# Altium PCB FT4232H-USB to UART.PcbDoc
Units mm, origin at the board's own origin, x right, y up, seen from the top; angles counter-clockwise.
Board outline 35.58 x 29.15 mm, 2 copper layers (Top Layer, Bottom Layer), stack 1.571 mm thick; 41 components, 61 nets, 210 pads, 46 vias.
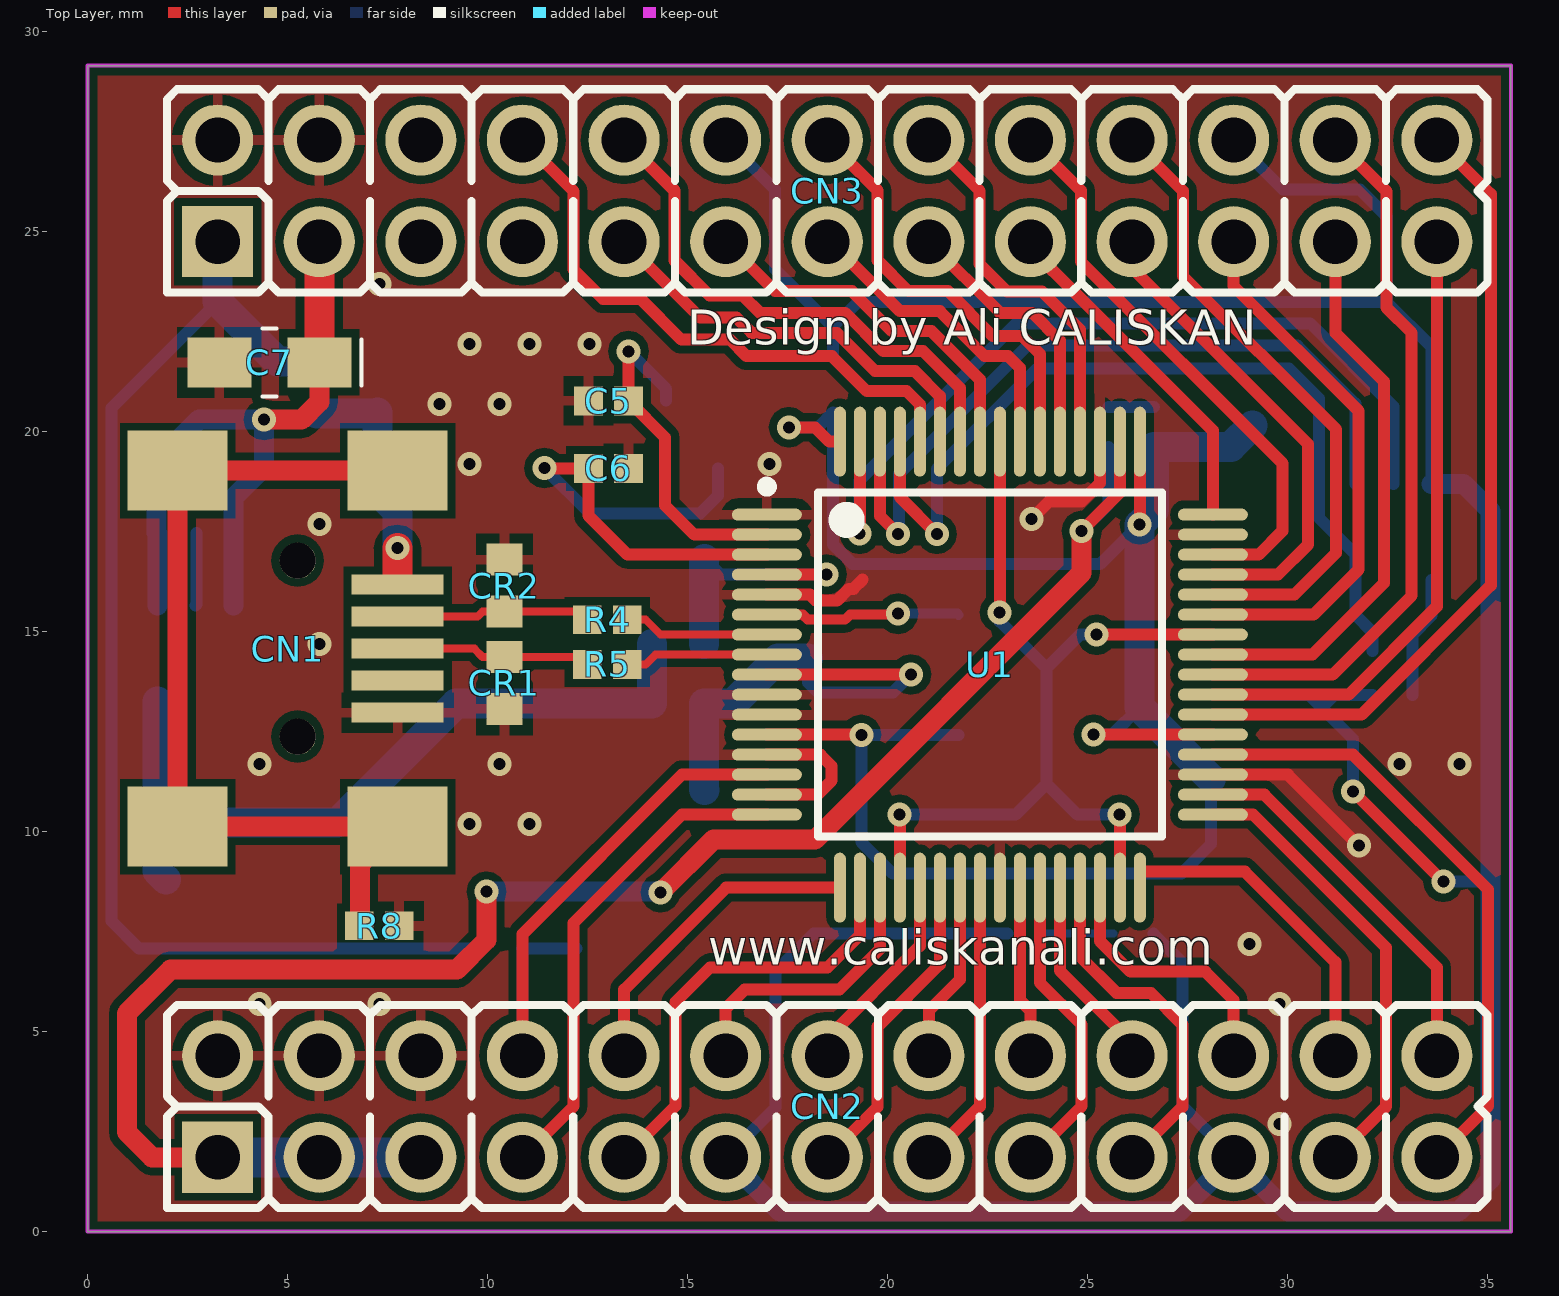
[diagram p0: Top Layer view]
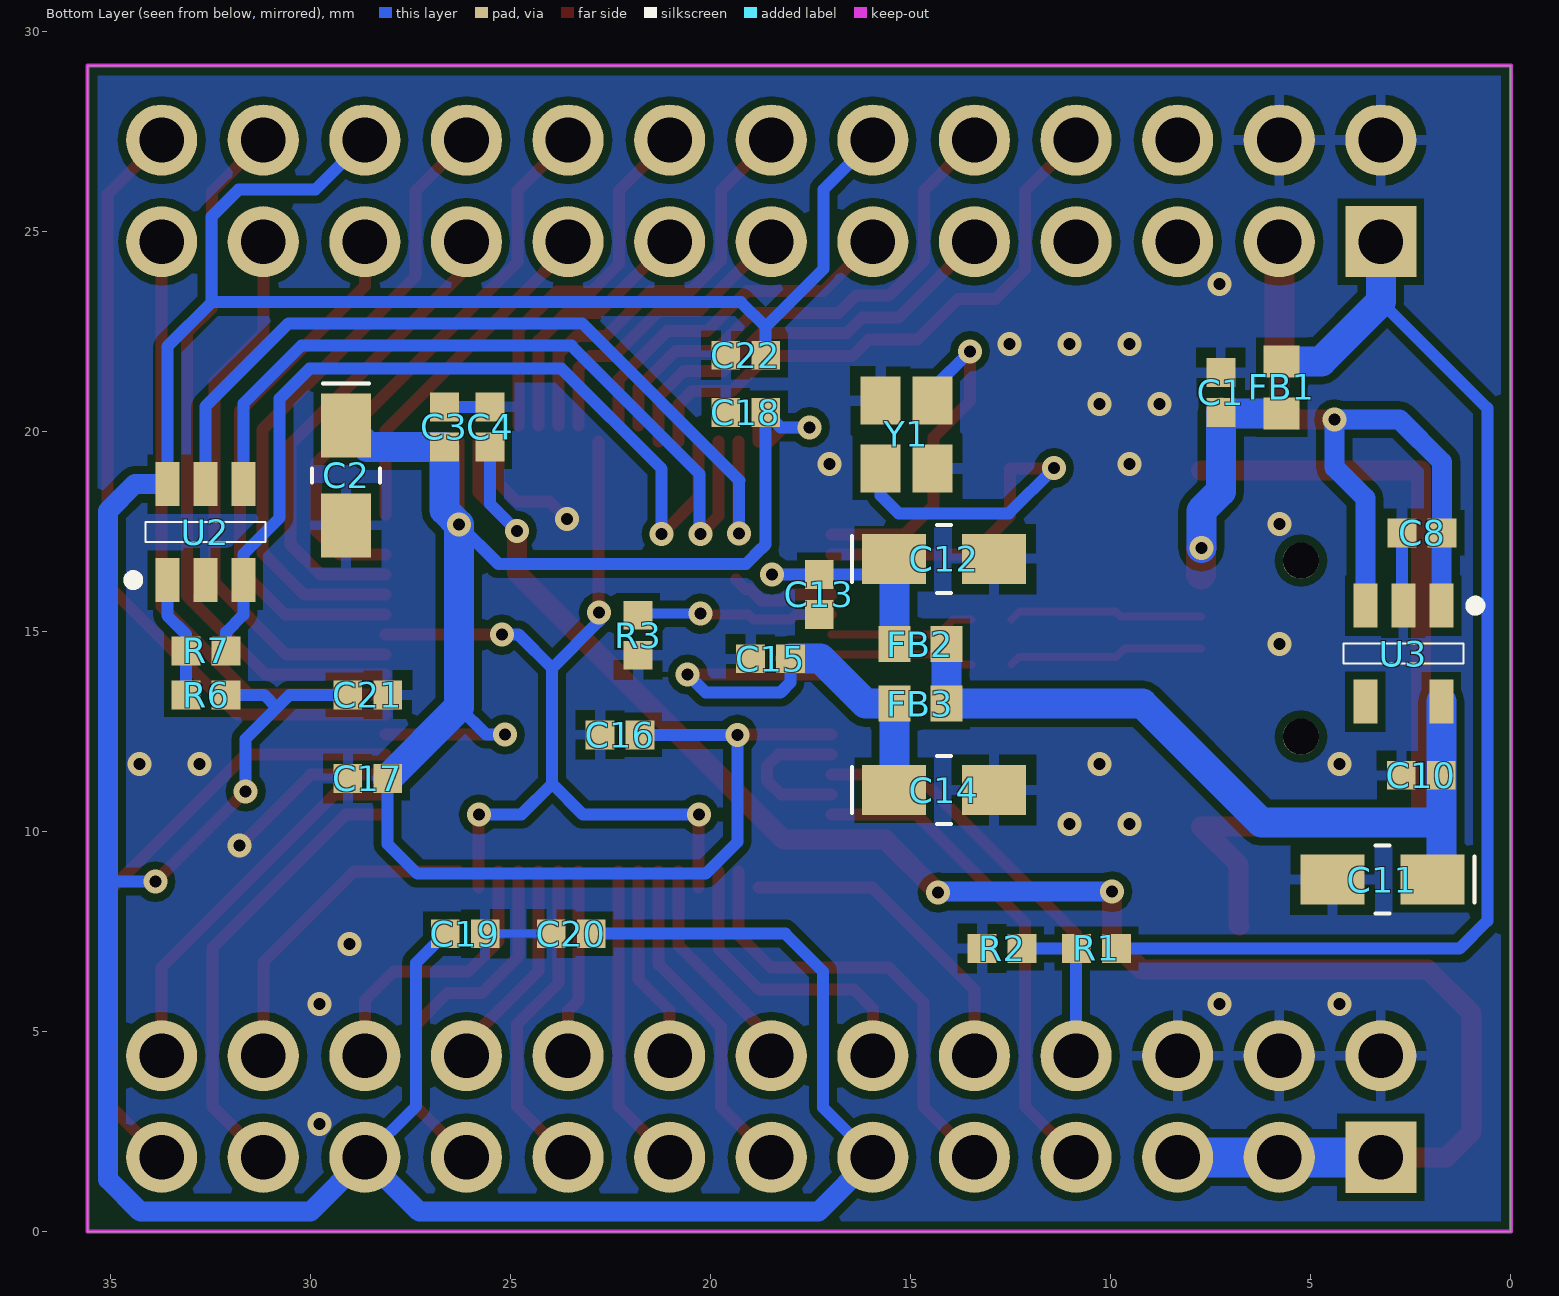
[diagram p1: Bottom Layer view, seen from below]
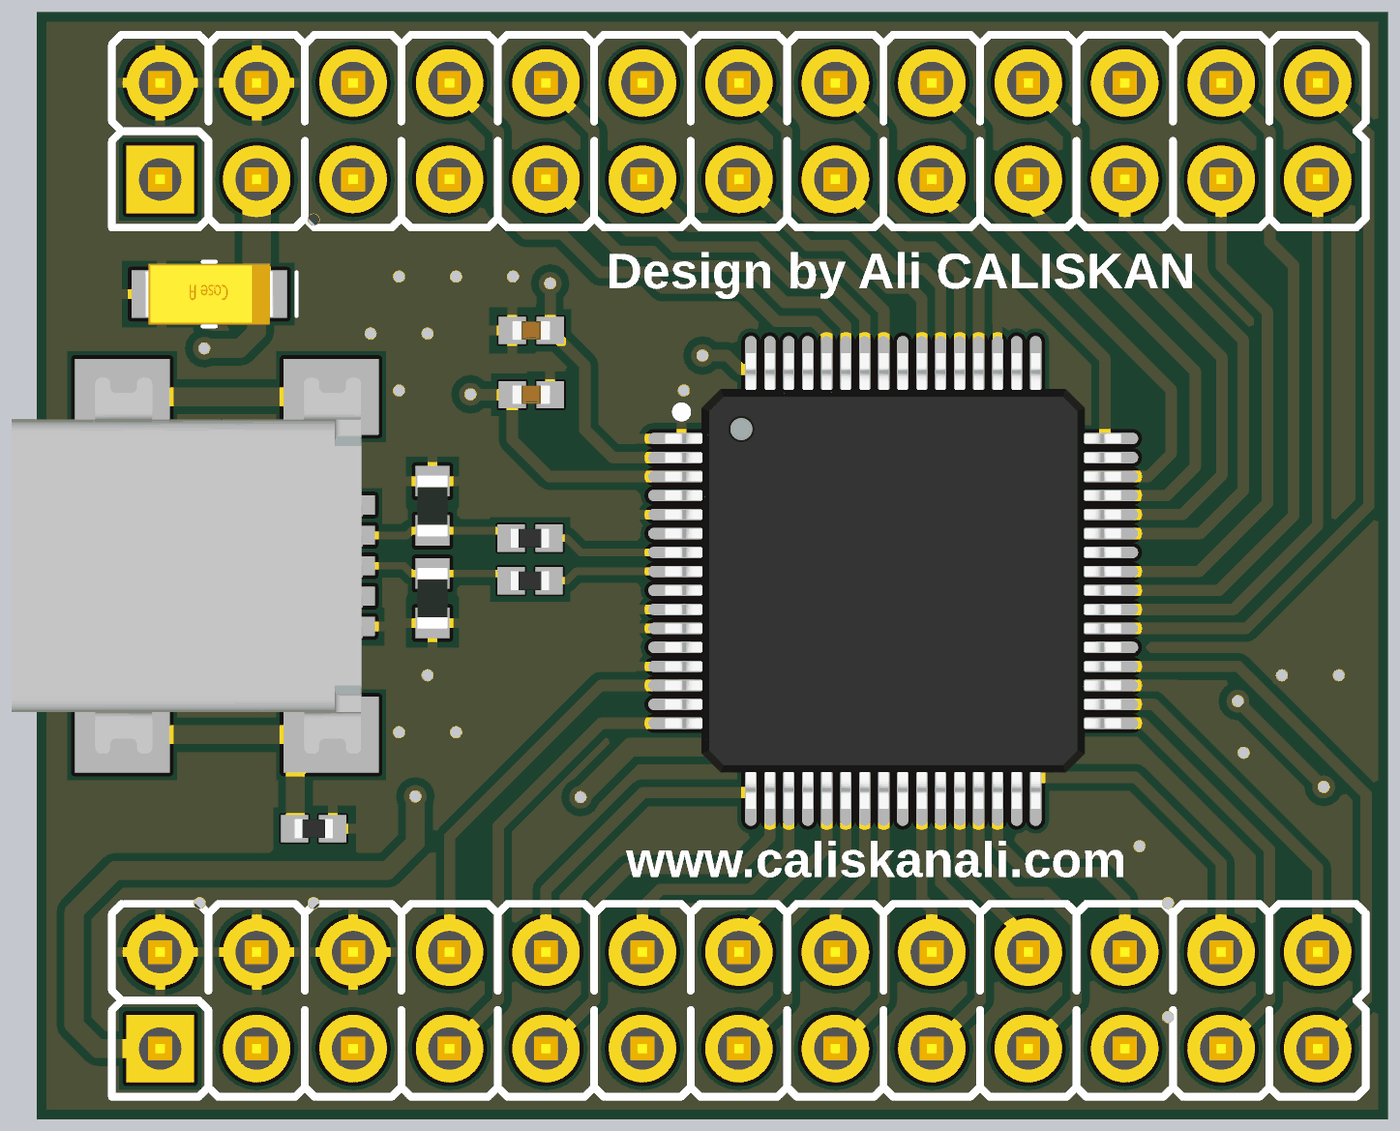
[diagram p2: 3D render of the assembled board from above, using the file's embedded part models]
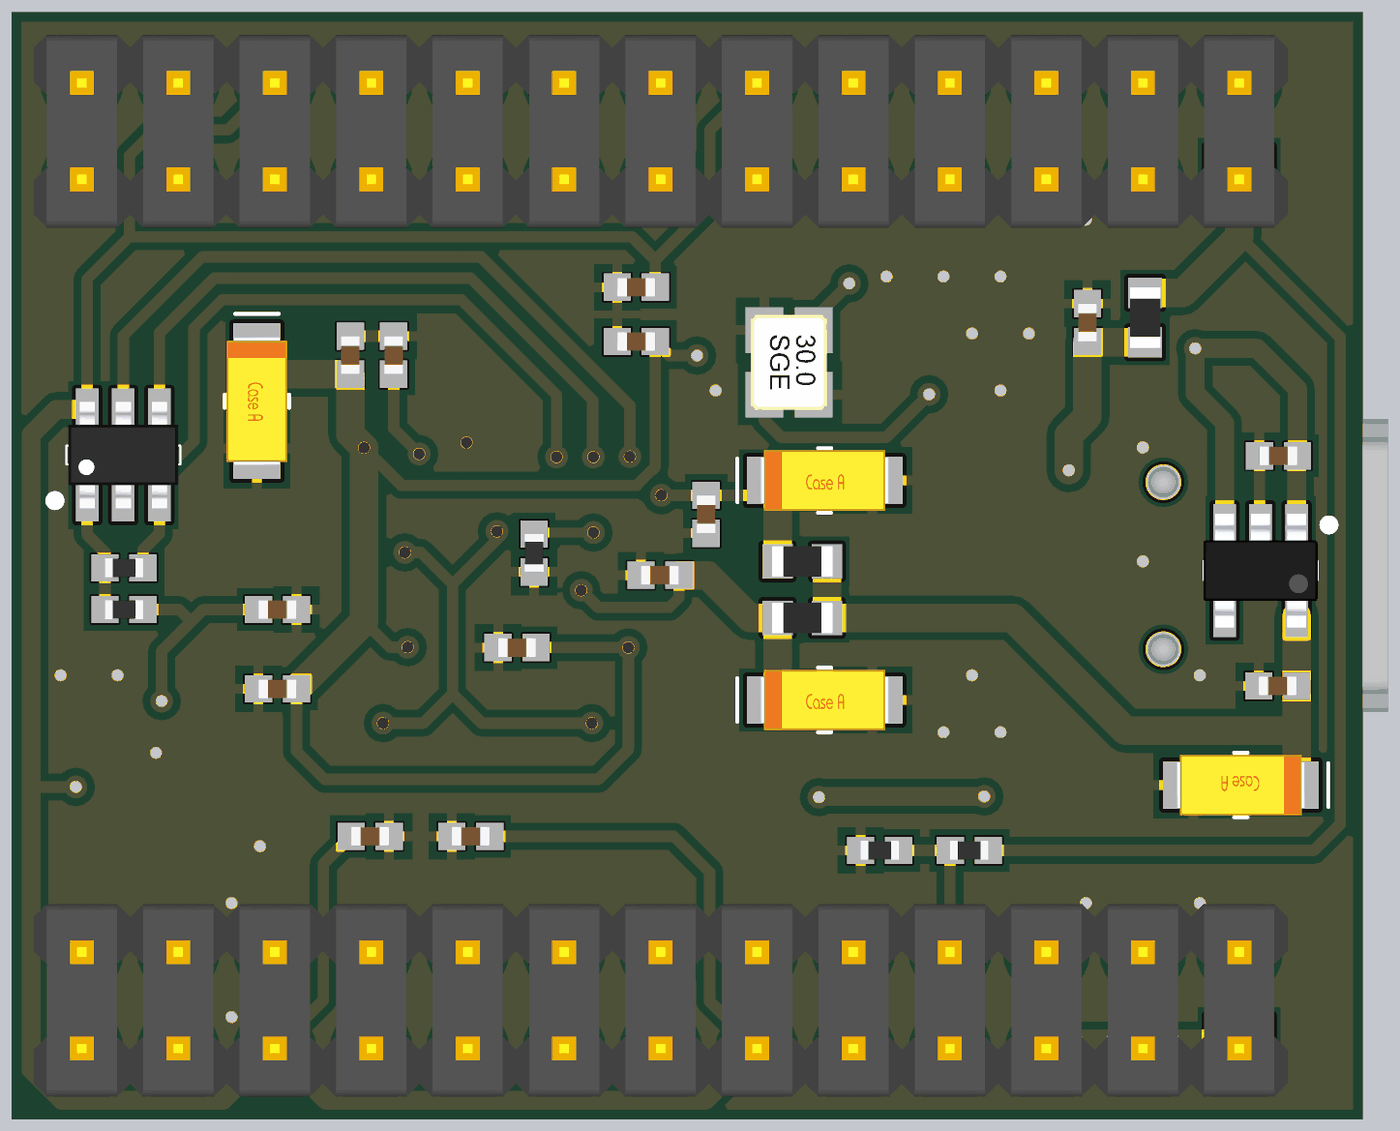
[diagram p3: 3D render of the assembled board from below, using the file's embedded part models]

## Layer stack, top to bottom
Top Solder: solder mask 0.0102, Solder Resist, Dk 3.5
Top Layer: signal copper 0.0356
Dielectric 1: dielectric 1.5, FR-4, Dk 4.8
Bottom Layer: signal copper 0.0356
Bottom Solder: solder mask 0.0102, Solder Resist, Dk 3.5

## Board outline
0,0 35.58,0 35.58,29.15 0,29.15

## Design rules (kind name [scope] priority, off if disabled: settings)
Clearance [All] p1: gap=0.2 ignorepadtopadclearanceinfootprint=FALSE except(0: Arc-Hole Track-Hole SMDPad-Hole THPad-Hole Via-Hole Fill-Hole Poly-Hole Region-Hole Text-Hole)
DiffPairsRouting "Schematic Differential Pairs Routing_3" [InNet('USB-B_P')] p1: maxlimit=0.2 minlimit=0.2 mostfreqgap=0.2 toplayer_minwidth=0.2 toplayer_maxwidth=0.2 toplayer_prefwidth=0.2 bottomlayer_minwidth=0.2 bottomlayer_maxwidth=0.2 bottomlayer_prefwidth=0.2 maxuncoupledlength=12.7
DiffPairsRouting "Schematic Differential Pairs Routing_1" [InNet('USB-B_N')] p2: maxlimit=0.2 minlimit=0.2 mostfreqgap=0.2 toplayer_minwidth=0.2 toplayer_maxwidth=0.2 toplayer_prefwidth=0.2 bottomlayer_minwidth=0.2 bottomlayer_maxwidth=0.2 bottomlayer_prefwidth=0.2 maxuncoupledlength=12.7
DiffPairsRouting "Schematic Differential Pairs Routing" [InNet('USB-A_P')] p3: maxlimit=0.2 minlimit=0.2 mostfreqgap=0.2 toplayer_minwidth=0.2 toplayer_maxwidth=0.2 toplayer_prefwidth=0.2 bottomlayer_minwidth=0.2 bottomlayer_maxwidth=0.2 bottomlayer_prefwidth=0.2 maxuncoupledlength=12.7
DiffPairsRouting "Schematic Differential Pairs Routing_2" [InNet('USB-A_N')] p4: maxlimit=0.2 minlimit=0.2 mostfreqgap=0.2 toplayer_minwidth=0.2 toplayer_maxwidth=0.2 toplayer_prefwidth=0.2 bottomlayer_minwidth=0.2 bottomlayer_maxwidth=0.2 bottomlayer_prefwidth=0.2 maxuncoupledlength=12.7
DiffPairsRouting [All] p5: maxlimit=0.254 minlimit=0.254 mostfreqgap=0.254 toplayer_minwidth=0.381 toplayer_maxwidth=0.381 toplayer_prefwidth=0.381 bottomlayer_minwidth=0.381 bottomlayer_maxwidth=0.381 bottomlayer_prefwidth=0.381 maxuncoupledlength=12.7
PolygonConnect isvia [IsVia] p1: connectstyle=Direct reliefconductorwidth=0.254 reliefentries=4 polygonreliefangle="90 Angle" airgapwidth=0.254
PolygonConnect [All] p2: connectstyle=Relief reliefconductorwidth=0.254 reliefentries=4 polygonreliefangle="90 Angle" airgapwidth=0.254
RoutingVias [All] p1: holewidth=0.3 width=0.6 viastyle="Through Hole" minholewidth=0.3 minwidth=0.6 maxholewidth=0.3 maxwidth=0.6
SolderMaskExpansion [All] p1: expansion=0.102
Width [All] p1 off: maxlimit=0.254 minlimit=0.254 preferedwidth=0.254
29 further rules are at their usual default settings.

## Classes and differential pairs
differential pair USB-B: +USB-B_P -USB-B_N
differential pair USB-A: +USB-A_P -USB-A_N

## Components (designator, comment, footprint, x,y, rotation, side; value= is the part's Value field where it differs from the comment)
C1 "10nF" C0402(1005) 7.25,20.98 r90 bottom
C2 "4.7uF" TANT_C1206(3216) 29.12,18.91 r270 bottom
C3 "100nF" C0402(1005) 26.66,20.12 r90 bottom
C4 "100nF" C0402(1005) 25.52,20.12 r90 bottom
C5 "30pF" C0402(1005) 13.02,20.77 r180 top
C6 "30pF" C0402(1005) 13.02,19.08 r0 top
C7 "4.7uF" TANT_C1206(3216) 4.54,21.73 r180 top
C8 "100nF" C0402(1005) 2.22,17.47 r0 bottom
C10 "100nF" C0402(1005) 2.24,11.41 r0 bottom
C11 "4.7uF" TANT_C1206(3216) 3.21,8.8 r0 bottom
C12 "4.7uF" TANT_C1206(3216) 14.17,16.82 r180 bottom
C13 "100nF" C0402(1005) 17.29,15.93 r270 bottom
C14 "4.7uF" TANT_C1206(3216) 14.17,11.04 r180 bottom
C15 "100nF" C0402(1005) 18.509,14.325 r0 bottom
C16 "100nF" C0402(1005) 22.27,12.42 r0 bottom
C17 "100nF" C0402(1005) 28.58,11.33 r0 bottom
C18 "100nF" C0402(1005) 19.13,20.48 r0 bottom
C19 "100nF" C0402(1005) 26.14,7.45 r180 bottom
C20 "100nF" C0402(1005) 23.49,7.45 r0 bottom
C21 "100nF" C0402(1005) 28.58,13.42 r180 bottom
C22 "100nF" C0402(1005) 19.13,21.91 r0 bottom
CN1 "Micro USB" MINI_USB 5,14.575 r0 top
CN2 "Header 13X2" "Pin Header 2x13 TH Pitch 2.54mm" 3.25,1.86 r0 top locked
CN3 "Header 13X2" "Pin Header 2x13 TH Pitch 2.54mm" 3.25,24.75 r0 top locked
CR1 "PGB1010603" R0603(1608) 10.42,13.72 r270 top
CR2 "PGB1010603" R0603(1608) 10.42,16.15 r90 top
FB1 "600R/0.5A" R0603(1608) 5.73,21.11 r90 bottom
FB2 "600R/0.5A" R0603(1608) 14.76,14.69 r0 bottom
FB3 "600R/0.5A" R0603(1608) 14.76,13.2 r0 bottom
R1 "15K" R0402(1005) 10.36,7.08 r180 bottom
R2 "10K" R0402(1005) 12.72,7.08 r180 bottom
R3 "12K" R0402(1005) 21.82,14.91 r90 bottom
R4 "10R" R0402(1005) 12.99,15.3 r0 top
R5 "10R" R0402(1005) 12.99,14.18 r0 top
R6 "10K" R0402(1005) 32.62,13.42 r180 bottom
R7 "2K" R0402(1005) 32.62,14.52 r0 bottom
R8 "0R" R0402(1005) 7.29,7.65 r180 top
U1 "IC_FT4232HL" LQFP-64 22.554,14.175 r0 top
U2 "93LC56B" SOT23-6 32.64,17.49 r90 bottom
U3 "TPS73633DBVR" SOT23-5 2.69,14.45 r270 bottom
Y1 "12MHz" XTAL_8Y 15.11,19.93 r270 bottom

## Footprints (in the part's own frame and the unit in brackets; to place one, negate y for a bottom-side part, rotate by r counter-clockwise, add the part's x,y. Pads: shape width x height; smd on the part's side, far side on the other; paste and mask are expansions set on the pad)
C0402(1005) [mm] "Chip Capacitor, Body 1.0x0.5mm, Height 0.6mm, IPC Low Density"
  rect 0.72x0.72 smd mask+0.05: 1(-0.5,0) 2(0.5,0)
  body extent -0.5,-0.25 0.5,0.25, height 0.5
LQFP-64 [mm] "64-Pin LQFP 0.5 mm Pitch"
  oval 1.75x0.3 smd: 1(-5.575,3.75) 2(-5.575,3.25) 3(-5.575,2.75) 4(-5.575,2.25) 5(-5.575,1.75) 6(-5.575,1.25) 7(-5.575,0.75) 8(-5.575,0.25) 9(-5.575,-0.25) 10(-5.575,-0.75) 11(-5.575,-1.25) 12(-5.575,-1.75) 13(-5.575,-2.25) 14(-5.575,-2.75) 15(-5.575,-3.25) 16(-5.575,-3.75) 33(5.575,-3.75) 34(5.575,-3.25) 35(5.575,-2.75) 36(5.575,-2.25) 37(5.575,-1.75) 38(5.575,-1.25) 39(5.575,-0.75) 40(5.575,-0.25) 41(5.575,0.25) 42(5.575,0.75) 43(5.575,1.25) 44(5.575,1.75) 45(5.575,2.25) 46(5.575,2.75) 47(5.575,3.25) 48(5.575,3.75)
  oval 0.3x1.75 smd: 17(-3.75,-5.575) 18(-3.25,-5.575) 19(-2.75,-5.575) 20(-2.25,-5.575) 21(-1.75,-5.575) 22(-1.25,-5.575) 23(-0.75,-5.575) 24(-0.25,-5.575) 25(0.25,-5.575) 26(0.75,-5.575) 27(1.25,-5.575) 28(1.75,-5.575) 29(2.25,-5.575) 30(2.75,-5.575) 31(3.25,-5.575) 32(3.75,-5.575) 49(3.75,5.575) 50(3.25,5.575) 51(2.75,5.575) 52(2.25,5.575) 53(1.75,5.575) 54(1.25,5.575) 55(0.75,5.575) 56(0.25,5.575) 57(-0.25,5.575) 58(-0.75,5.575) 59(-1.25,5.575) 60(-1.75,5.575) 61(-2.25,5.575) 62(-2.75,5.575) 63(-3.25,5.575) 64(-3.75,5.575)
  silkscreen extent -5.7,-4.3 4.3,4.57, body extent -6,-6 6,6, height 1.5
MINI_USB [mm]
  round 0.9 hole 0.9: 0(0.25,-2.2) 0(0.25,2.2)
  rect 2.3x0.5 smd: 1(2.75,1.6) 2(2.75,0.8) 3(2.75,0) 4(2.75,-0.8) 5(2.75,-1.6)
  rect 2.5x2 smd: 6(-2.75,-4.45) 6(-2.75,4.45) 6(2.75,-4.45) 6(2.75,4.45)
  body extent -5.66,-4.95 3.59,4.95, height 3.98
"Pin Header 2x13 TH Pitch 2.54mm" [mil] "PinHeader 1x1 TH Pitch 2.54mm"
  rect 70x70 hole 44: 1(0,0)
  round 70 hole 44: 2(0,100) 3(100,0) 4(100,100) 5(200,0) 6(200,100) 7(300,0) 8(300,100) 9(400,0) 10(400,100) 11(500,0) 12(500,100) 13(600,0) 14(600,100) 15(700,0) 16(700,100) 17(800,0) 18(800,100) 19(900,0) 20(900,100) 21(1000,0) 22(1000,100) 23(1100,0) 24(1100,100) 25(1200,0) 26(1200,100)
  silkscreen extent -50,-50 1250,150, body extent -50,-50 1250,150, height 374
R0402(1005) [mm] "Chip Capacitor, Body 1.0x0.5mm, Height 0.6mm, IPC Low Density"
  rect 0.72x0.72 smd mask+0.05: 1(-0.5,0) 2(0.5,0)
  body extent -0.5,-0.25 0.5,0.25, height 0.3
R0603(1608) [mm] "Chip Capacitor, Body 1.0x0.5mm, Height 0.6mm, IPC Low Density"
  rect 0.8x0.9 smd: 1(-0.65,0) 2(0.65,0)
  body extent -0.8,-0.4 0.8,0.4, height 0.45
SOT23-5 [mm] "SOT23, 5-Leads, Body 3.0x3.0mm (max), Pitch 0.95mm, IPC Medium Density"
  rect 1.1x0.6 smd: 1(-1.2,0.95) 2(-1.2,0) 3(-1.2,-0.95) 4(1.2,-0.95) 5(1.2,0.95)
  silkscreen extent -1.32,-1.5 0.25,1.92, body extent -1.5,-1.5 1.5,1.5, height 1.3
SOT23-6 [mm] "SOT23, 5-Leads, Body 3.0x3.0mm (max), Pitch 0.95mm, IPC Medium Density"
  rect 1.1x0.6 smd: 1(-1.2,0.95) 2(-1.2,0) 3(-1.2,-0.95) 4(1.2,-0.95) 5(1.2,0) 6(1.2,0.95)
  silkscreen extent -1.32,-1.5 0.25,1.93, body extent -1.4,-1.45 1.4,1.45, height 1.45
TANT_C1206(3216) [mm]
  rect 1.6x1.25 smd: 1(-1.25,0) 2(1.25,0)
  silkscreen extent -2.3,-0.85 0.18,0.85, body extent -1.7,-0.8 1.7,0.8, height 1.65
XTAL_8Y [mm]
  rect 1.2x1 smd mask+0: 1(-0.85,-0.65) 2(0.85,-0.65) 3(0.85,0.65) 4(-0.85,0.65)
  body extent -1.25,-1 1.25,1, height 0.55

## Part data
C1 C3 C4 C5 C6 C8 C10 C13 C15 C16 C17 C18 C19 C20 C21 C22: library part CAP, "Capacitor"
C2 C7 C11 C12 C14: library part ELECTRO, "Tantalum Capacitor"
CN1: library part 280024, "Micro USB Connector"
CN2 CN3: "Header, 13-Pin, Dual row"
CR1 CR2: library part 266170, "TVS DIODE 24VWM 150VC 0603"
FB1 FB2 FB3: library part "L TYPE 1", "Ferrite Bead"
R1 R2 R3 R4 R5 R6 R7 R8: library part RES2, "Resistor"
U1: "Quad High Speed USB to Multipurpose UART/MPSSE"
U2: "IC EEPROM 2KBIT 2MHZ SOT23-6"
U3: library part TPS736XX, "IC REG LDO 3.3V 0.4A SOT23-5"
Y1: "XTAL  7S"

## Via types
v1: diameter 0.6, hole 0.3, Top Layer to Bottom Layer, tented both sides, 46 vias

## Nets (pads, with @x,y where several pads share a name; then routed paths per layer and width w, separated by ;. In a path a pad name is that pad's centre, name@x,y a point inside that pad or via, vN(x,y) a via of type N, cw(c..) or ccw(c..) an arc to the next point about the centre after c; other vN are vias at no path point)
AD0: CN2.7 U1.16 | length 12.3
  Top Layer w0.3: CN2.7 12.15,3.14 12.15,7.72 14.855,10.425 U1.16
AD1: CN2.10 U1.17 | length 8.1
  Top Layer w0.3: CN2.10 13.41,6.05 15.96,8.6 U1.17
AD2: CN2.9 U1.18 | length 11.3
  Top Layer w0.3: CN2.9 14.69,3.14 14.69,5.74 15.56,6.61 18.5,6.61 19.304,7.414 U1.18@19.304,9
AD3: CN2.12 U1.19 | length 7.6
  Top Layer w0.3: CN2.12 15.95,5.58 16.42,6.05 18.79,6.05 19.804,7.064 U1.19@19.804,9
AD4: CN2.14 U1.21 | length 5.6
  Top Layer w0.3: CN2.14 18.49,4.83 20.804,7.144 U1.21@20.804,9
AD5: CN2.13 U1.22 | length 8.3
  Top Layer w0.3: CN2.13 19.75,3.12 19.75,5.13 21.304,6.684 U1.22@21.304,9
AD6: CN2.16 U1.23 | length 4.9
  Top Layer w0.3: CN2.16 21.03,5.526 21.804,6.3 21.804,6.364 U1.23@21.804,9
AD7: CN2.15 U1.24 | length 7.7
  Top Layer w0.3: CN2.15 22.304,3.134 U1.24@22.304,9
BD0: CN2.18 U1.26 | length 4.7
  Top Layer w0.3: U1.26@23.304,9 23.304,6.066 23.304,5.792 23.57,5.526 CN2.18
BD1: CN2.17 U1.27 | length 8.1
  Top Layer w0.3: CN2.17 24.85,3.14 24.85,5.18 23.804,6.226 U1.27@23.804,9
BD2: CN2.20 U1.28 | length 5.3
  Top Layer w0.3: U1.28@24.304,9 24.304,6.526 26.11,4.72 CN2.20
BD3: CN2.19 U1.29 | length 9.2
  Top Layer w0.3: U1.29@24.804,9 U1.29 24.804,6.886 25.72,5.97 26.58,5.97 27.37,5.18 27.37,3.12 CN2.19
BD4: CN2.22 U1.30 | length 7.1
  Top Layer w0.3: U1.30@25.304,9 U1.30 25.304,7.266 26.07,6.5 27.94,6.5 28.65,5.79 CN2.22
BD5: CN2.24 U1.32 | length 8.2
  Top Layer w0.3: U1.32@26.304,9 28.93,9 31.19,6.74 CN2.24
BD6: CN2.23 U1.33 | length 11.5
  Top Layer w0.3: U1.33 29.135,10.425 32.46,7.1 32.46,3.13 CN2.23
BD7: CN2.26 U1.34 | length 9.6
  Top Layer w0.3: U1.34 29.415,10.925 33.73,6.61 CN2.26
CD0: CN3.26 U1.38 | length 20
  Top Layer w0.3: U1.38 31.845,12.925 35.08,16.16 35.08,25.94 CN3.26
CD1: CN3.25 U1.39 | length 15.6
  Top Layer w0.3: U1.39 31.525,13.425 33.73,15.63 CN3.25
CD2: CN3.24 U1.40 | length 18
  Top Layer w0.3: U1.40 31.125,13.925 33.1,15.9 33.1,22.47 32.47,23.1 32.47,26.01 CN3.24
CD3: CN3.23 U1.41 | length 14.1
  Top Layer w0.3: U1.41 30.615,14.425 32.41,16.22 32.41,21.25 31.19,22.47 CN3.23
CD4: CN3.21 U1.43 | length 13.6
  Top Layer w0.3: U1.43 30.645,15.425 31.77,16.55 31.77,20.52 28.65,23.64 CN3.21
CD5: CN3.20 U1.44 | length 15.9
  Top Layer w0.3: CN3.20 27.38,26.02 27.38,23.89 31.21,20.06 31.21,16.97 30.165,15.925 U1.44
CD6: CN3.19 U1.45 | length 12.1
  Top Layer w0.3: CN3.19 26.11,24.09 30.51,19.69 30.51,17.18 29.755,16.425 U1.45
CD7: CN3.18 U1.46 | length 14.4
  Top Layer w0.3: CN3.18 24.83,26.03 24.83,24.25 29.87,19.21 29.87,17.52 29.275,16.925 U1.46
CLK: CN3.6
CS: CN3.5
DATA: CN3.7
DD0: CN3.17 U1.48 | length 8.7
  Top Layer w0.3: CN3.17 23.57,24.57 24.14,24 24.157,24 28.129,20.028 U1.48
DD1: CN3.16 U1.52 | length 9.2
  Top Layer w0.3: CN3.16 22.3,26.02 22.3,24.187 22.987,23.5 23.86,23.5 24.804,22.556 U1.52@24.804,20.15
DD2: CN3.15 U1.53 | length 6.4
  Top Layer w0.3: CN3.15 22.81,22.97 23.61,22.97 24.304,22.276 U1.53@24.304,20.15
DD3: CN3.14 U1.54 | length 10.3
  Top Layer w0.3: CN3.14 19.75,26.03 19.75,24.278 20.517,23.511 21.511,23.511 22.632,22.39 23.36,22.39 23.804,21.946 U1.54@23.804,20.15
DD4: CN3.13 U1.55 | length 7.6
  Top Layer w0.3: CN3.13 18.571,24.75 20.31,23.011 21.304,23.011 22.425,21.89 23.01,21.89 23.304,21.596 U1.55@23.304,20.15
DD5: CN3.11 U1.57 | length 8.9
  Top Layer w0.3: CN3.11 17.189,23.511 19.103,23.511 20.103,22.511 21.096,22.511 22.304,21.303 U1.57@22.304,20.15
DD6: CN3.10 U1.58 | length 12.9
  Top Layer w0.3: CN3.10 14.67,26.03 14.67,24.278 15.548,23.4 16.377,23.4 16.807,22.97 18.936,22.97 19.895,22.011 20.889,22.011 21.804,21.096 U1.58@21.804,20.15
DD7: CN3.9 U1.59 | length 10.6
  Top Layer w0.3: CN3.9 15.31,22.85 16.22,22.85 16.6,22.47 18.729,22.47 19.688,21.511 20.682,21.511 21.304,20.889 U1.59
GND: C1.2 C2.2 C3.2 C4.2 C5.2 C6.2 C7.2 C8.2 C10.2 C11.2 C12.2 C13.2 C14.2 C15.2 C16.2 C17.2 C18.2 C19.2 C20.2 C21.2 C22.2 CN1.5 CN2.2 CN2.4 CN2.6 CN3.2 CN3.4 CR1.2 CR2.2 R2.1 R3.1 R8.1 U1.1 U1.5 U1.10 U1.11 U1.13 U1.15 U1.25 U1.35 U1.47 U1.51 U2.2 U3.2 Y1.1 Y1.3 | length 18.7
  Top Layer w0.3: U1.15 18.245,10.925 18.6,11.28 18.6,11.64 18.315,11.925 U1.13 ; U1.5 18.053,15.925 18.198,15.78 18.739,15.78 19.029,16.07 19.14,16.07 19.37,16.3 ; v1(23.6,17.82) 24.03,18.25 24.84,18.25 25.304,18.714 U1.51 ; U1.35 30.005,11.425 v1(31.78,9.65)
  Bottom Layer w0.2: C20.2 C19.2
  Bottom Layer w0.3: U3.2 2.72,15.68 C8.2 ; C4.2 C3.2
  other v1: 29.79,2.69 4.29,5.69 7.29,5.69 29.79,5.69 29.04,7.19 9.54,10.19 11.04,10.19 4.29,11.69 10.29,11.69 32.79,11.69 34.29,11.69 5.79,14.69 5.79,17.69 9.54,19.19 17.04,19.19 8.79,20.69 10.29,20.69 9.54,22.19 11.04,22.19 12.54,22.19 7.29,23.69
NetC1_1: C1.1 CN1.1 FB1.1 | length 5.8
  Top Layer w0.75: v1(7.74,17.09) 7.75,17.08 7.75,16.43
  Bottom Layer w0.75: FB1.1 7.23,20.46 C1.1 7.25,18.51 7.74,18.02 v1(7.74,17.09)
NetC5_1: C5.1 U1.2 Y1.4 | length 8.7
  Top Layer w0.3: v1(13.52,22.01) C5.1 14.43,19.86 14.43,18.16 15.165,17.425 U1.2
  Bottom Layer w0.3: v1(13.52,22.01) 14.46,21.07 Y1.4
NetC6_1: C6.1 U1.3 Y1.2 | length 12.8
  Top Layer w0.3: v1(11.42,19.09) 11.43,19.08 C6.1 12.52,17.9 13.495,16.925 U1.3
  Bottom Layer w0.3: v1(11.42,19.09) 12.55,17.96 15.31,17.96 15.76,18.41 Y1.2
NetC10_1: C10.1 C11.1 FB2.1 FB3.1 U3.5 | length 19.6
  Bottom Layer w0.75: U3.5 1.74,10.23 ; C11.1 1.74,9.02 1.74,10.23 ; FB2.1 FB3.1 9.21,13.2 6.24,10.23 1.74,10.23
NetCN1_6: CN1.6 R8.2 | length 22.8
  Top Layer w0.5: R8.2 6.81,7.67 6.81,9.185 7.75,10.125 2.25,10.125 2.25,19.025 CN1.6@7.75,19.025
NetR3_2: R3.2 U1.6 | length 4.9
  Top Layer w0.254: U1.6 17.879,15.425 18.001,15.303 18.937,15.303 19.059,15.425 20.235,15.425 v1(20.26,15.45)
  Bottom Layer w0.254: v1(20.26,15.45) 21.74,15.45 R3.2@21.77,15.42
NetR6_1: R6.1 R7.2 U2.1 | length 3.1
  Bottom Layer w0.3: R6.1 33.12,14.93 33.59,15.4 U2.1
NetR7_1: R7.1 U1.61 U2.3 | length 22.1
  Top Layer w0.3: U1.61 20.304,18.366 v1(21.23,17.44)
  Bottom Layer w0.3: v1(21.23,17.44) 21.23,19.07 23.74,21.58 30.03,21.58 30.78,20.83 30.78,17.85 31.69,16.94 U2.3 31.69,15.42 32.12,14.99 R7.1
NetU1_62: U1.62 U2.4 | length 19.4
  Top Layer w0.3: U1.62 19.804,17.896 v1(20.26,17.44)
  Bottom Layer w0.3: v1(20.26,17.44) 20.28,17.46 20.28,18.94 23.49,22.15 30.24,22.15 31.69,20.7 U2.4
NetU1_63: U1.63 U2.5 | length 21.4
  Top Layer w0.3: v1@19.304,17.44 U1.63
  Bottom Layer w0.3: v1(19.3,17.45) 19.3,18.77 19.29,18.78 23.22,22.71 30.56,22.71 32.64,20.63 U2.5
PWREN#: CN3.8 U1.60 | length 14.8
  Top Layer w0.3: CN3.8 12.15,26.01 12.15,24.05 12.88,23.32 13.82,23.32 14.84,22.3 16.06,22.3 16.47,21.89 18.602,21.89 19.481,21.011 20.475,21.011 20.804,20.682 U1.60
RESET#: CN2.8 R1.1 R2.2 U1.14 | length 14.8
  Top Layer w0.3: CN2.8 10.87,7.44 14.855,11.425 U1.14
  Bottom Layer w0.3: CN2.8 10.87,7.07 R1.1 R2.2
SUSPEND#: CN2.25 U1.36 | length 15.5
  Top Layer w0.3: U1.36 31.634,11.925 35.01,8.549 35.01,3.14 CN2.25
USB-A_N: CN1.2 CR2.1 R4.1 | length 4.9
  Top Layer w0.2: CN1.2 9.745,15.375 9.87,15.5 CR2.1 12.29,15.5 R4.1
USB-A_P: CN1.3 CR1.1 R5.1 | length 4.9
  Top Layer w0.2: CN1.3 9.665,14.575 9.87,14.37 CR1.1 12.3,14.37 R5.1
USB-B_N: R4.2 U1.7 | length 3.6
  Top Layer w0.2: R4.2 13.95,15.3 14.325,14.925 U1.7
USB-B_P: R5.2 U1.8 | length 3.6
  Top Layer w0.2: R5.2 13.95,14.18 14.195,14.425 U1.8
VBUS: CN3.1 FB1.2 R1.2 | length 30.7
  Bottom Layer w0.3: 3.25,23.25 0.59,20.59 0.59,7.77 1.28,7.08 R1.2
  Bottom Layer w0.75: CN3.1 3.25,23.25 4.74,21.76 FB1.2
VCC: C7.1 C8.1 CN3.3 U3.1 U3.3 | length 17.3
  Top Layer w0.5: v1(4.41,20.3) 5.35,20.3 5.79,20.74 C7.1
  Top Layer w0.75: C7.1 CN3.3
  Bottom Layer w0.5: U3.1 1.74,17.45 C8.1 1.72,19.24 2.78,20.3 v1(4.41,20.3) 4.41,19.11 3.64,18.34 U3.3
VCC3V3: C4.1 CN2.1 CN2.3 CN2.5 U1.50 | length 45.8
  Top Layer w0.3: v1(24.85,17.52) 25.804,18.474 U1.50
  Top Layer w0.5: CN2.1 1.61,1.86 0.98,2.49 0.98,5.46 2.07,6.55 9.23,6.55 9.97,7.29 v1(9.97,8.5) ; v1(14.32,8.48) 15.64,9.8 18.181,9.8 24.85,16.469 v1(24.85,17.52)
  Bottom Layer w0.3: v1(24.85,17.52) 25.52,18.19 C4.1
  Bottom Layer w0.5: v1(9.97,8.5) 14.3,8.5 v1(14.32,8.48)
  Bottom Layer w1: CN2.1 CN2.3 CN2.5
VCCIO: U1.20 U1.31 U1.42 U1.56 | length 23.3
  Top Layer w0.3: v1(20.3,10.43) 20.304,10.426 U1.20 ; v1(22.8,15.48) 22.804,15.484 U1.56 ; v1(25.225,14.925) U1.42 ; v1(25.8,10.43) 25.804,10.426 U1.31
  Bottom Layer w0.3: v1(20.3,10.43) 23.2,10.43 23.97,11.2 ; v1(22.8,15.48) 22.8,15.26 23.97,14.09 ; v1(25.225,14.925) 24.815,14.925 24.81,14.93 23.97,14.09 ; v1(25.8,10.43) 24.74,10.43 23.97,11.2 ; 23.97,11.2 23.97,14.09
VCORE: C2.1 C3.1 C16.1 C17.1 C18.1 U1.12 U1.37 U1.49 U1.64 | length 51.8
  Top Layer w0.3: U1.12 19.335,12.425 v1(19.34,12.42) ; v1(17.53,20.11) 18.18,20.11 18.54,19.75 U1.64 U1.64@18.804,20.406 ; v1(25.15,12.43) 25.155,12.425 U1.37 ; v1(26.3,17.68) 26.304,17.684 U1.49
  Bottom Layer w0.3: v1(17.53,20.11) 18.26,20.11 C18.1 18.63,17.181 18.731,17.08 18.739,17.08 19.12,16.699 19.12,16.691 25.311,16.691 v1(26.3,17.68) ; C16.1 v1(19.34,12.42) 19.34,9.74 20.13,8.95 27.34,8.95 28.08,9.69 C17.1 ; v1(25.15,12.43) 25.62,12.43 26.3,13.11
  Bottom Layer w0.75: C17.1 26.3,13.11 v1(26.3,17.68) 26.66,18.04 C3.1 28.58,19.62 C2.1
VIO: C19.1 C20.1 C21.1 C22.1 CN2.11 CN2.21 CN3.12 CN3.22 R6.2 U2.6 | length 99.9
  Top Layer w0.3: v1(31.63,11.01) v1(33.89,8.75)
  Bottom Layer w0.3: CN2.11 17.2,3.11 17.2,6.51 18.14,7.45 C20.1 ; CN3.12 17.189,26.051 17.189,24.061 18.63,22.62 ; C22.1 18.63,22.62 ; C19.1 27.37,6.72 27.37,3.14 CN2.21 ; CN3.22 29.889,26.051 31.809,26.051 32.48,25.38 32.48,23.24 ; C21.1 30.53,13.42 30.85,13.1 ; v1(31.63,11.01) 31.63,12.32 30.85,13.1 ; R6.2 31.17,13.42 30.85,13.1 ; U2.6 33.59,22.13 32.48,23.24 ; v1(33.89,8.75) 35.069,8.75 ; 35.019,7.44 35.069,7.49 ; 18.63,22.62 19.25,23.24 32.48,23.24
  Bottom Layer w0.5: CN2.11 17.31,0.5 27.29,0.5 CN2.21 30.01,0.5 34.264,0.5 35.069,1.305 35.069,7.49 35.069,8.75 35.069,18.021 34.4,18.69 U2.6
VPHY: C12.1 C13.1 FB2.2 U1.4 | length 6.9
  Top Layer w0.3: U1.4 18.465,16.425 v1(18.47,16.43)
  Bottom Layer w0.3: C12.1 15.81,16.43 C13.1 v1@18.54,16.43
  Bottom Layer w0.75: FB2.2 15.41,16.81 C12.1
VPLL: C14.1 C15.1 FB3.2 U1.9 | length 12.3
  Top Layer w0.3: U1.9 20.575,13.925 v1(20.58,13.93)
  Bottom Layer w0.3: C15.1 18.009,13.731 18.26,13.48 20.13,13.48 v1(20.58,13.93)
  Bottom Layer w0.75: C14.1 15.41,11.05 FB3.2 16.13,13.2 17.255,14.325 C15.1
pads on no net: CN1.0 CN1.4 U3.4

## Polygon pours and split planes (outlines as drawn)
GND on Top Layer "GND_L01_P002" (solid, pour order 2): 0,0 35.58,0 35.58,29.15 0,29.15
GND on Bottom Layer "GND_L02_P000" (solid, pour order 0): 0,0 35.58,0 35.58,29.15 0,29.15

## Keep-outs
Keep-Out Layer:
  the board outline again, w0.1

## Silkscreen, mask and mechanical layers (free items; w line width, h text height)
Top Overlay:
  text "Design by Ali CALISKAN" at 14.99,21.88 h1.5
  text "www.caliskanali.com" at 15.52,6.38 h1.5